# Altium PCB IMUCubePIN_Pcb.PcbDoc
Units mil, origin at the board's own origin, x right, y up, seen from the top; angles counter-clockwise.
Board outline 400 x 400 mil, 2 copper layers (Top Layer, Bottom Layer), stack 38.583 mil thick; 2 components, 6 nets, 20 pads, 1 vias.
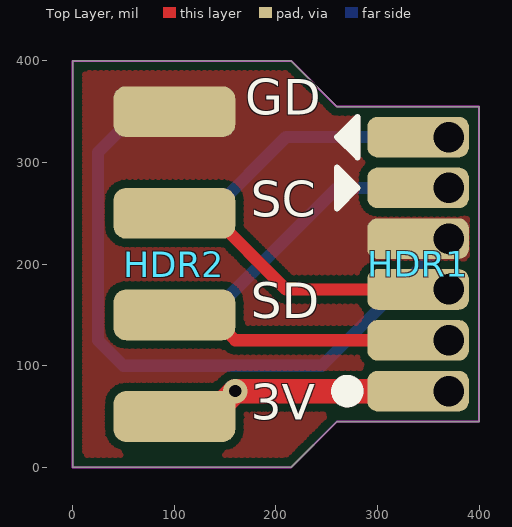
[diagram p0: Top Layer view]
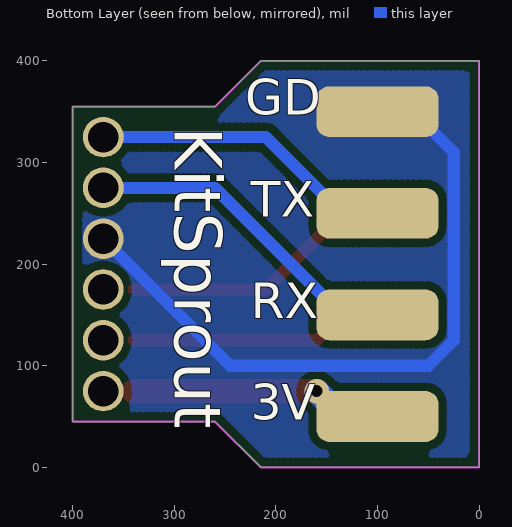
[diagram p1: Bottom Layer view, seen from below]

## Layer stack, top to bottom
Top Solder: solder mask 0.3937, Solder Resist, Dk 3.5
Top Layer: signal copper 1.5748
Dielectric 1: dielectric 35.4331, FR-4, Dk 4.8
Bottom Layer: signal copper 1.5748
Bottom Solder: solder mask 0.3937, Solder Resist, Dk 3.5

## Board outline
0,0 0,400 215,400 260,355 400,355 400,45 260,45 215,0

## Design rules (kind name [scope] priority, off if disabled: settings)
Clearance ClearancePolygon [InPolygon] p1: gap=8
Clearance [All] p2: gap=6
ComponentClearance [All] p1: gap=0 collisioncheckmode=3 verticalgap=0 showdistances=FALSE
Height [All] p1: minheight=0 maxheight=5000 prefheight=500
HoleSize [All] p1: absolutevalues=TRUE maxlimit=200 minlimit=1 maxpercent=80.000 minpercent=20.000
HoleToHoleClearance [All] p1: gap=6 allowstackedmicrovias=TRUE
MinimumSolderMaskSliver [All] p1: minsoldermaskwidth=0
PolygonConnect [All] p1: connectstyle=Direct reliefconductorwidth=10 reliefentries=4 polygonreliefangle="90 Angle" airgapwidth=10
RoutingVias [All] p1: holewidth=12 width=24 viastyle="Through Hole" minholewidth=12 minwidth=20 maxholewidth=28 maxwidth=50
SilkToSilkClearance [All] p1: silktosilkclearance=0
SilkToSolderMaskClearance [IsPad] p1: minsilkscreentomaskgap=0 clearancetoexposedcopper=TRUE
SolderMaskExpansion [All] p1: expansion=2
Width [All] p1: maxlimit=50 minlimit=6 preferedwidth=10
23 further rules are at their usual default settings.

## Components (designator, comment, footprint, x,y, rotation, side; value= is the part's Value field where it differs from the comment)
HDR1 "HDR1x6_1.27" HDR1X6_1.27_180H 340,325 r0 top
HDR2 "HDR2x4_2.54" HDR2X4_2.54_180H 100,50 r180 top

## Footprints (in the part's own frame and the unit in brackets; to place one, negate y for a bottom-side part, rotate by r counter-clockwise, add the part's x,y. Pads: shape width x height; smd on the part's side, far side on the other; paste and mask are expansions set on the pad)
HDR1X6_1.27_180H [mil]
  rrect50% 100x40 smd: 1(0,0) 2(0,-50) 3(0,-100) 4(0,-150) 5(0,-200) 6(0,-250)
  body extent -47,-275 265,25, height 49
HDR2X4_2.54_180H [mil]
  rrect50% 120x50 smd: 1(0,0) 3(0,-100) 5(0,-200) 7(0,-300)
  rrect50% 120x50 smd far side: 2(0,0) 4(0,-100) 6(0,-200) 8(0,-300)
  body extent -38,-350 415,50, height 100

## Part data
HDR1 HDR2: "Header"

## Free pads (board coordinates)
  round 40 hole 30: 1(370,75) 1(370,125) 1(370,175) 1(370,225) 1(370,275) 1(370,325)

## Via types
v1: diameter 24, hole 12, Top Layer to Bottom Layer, 1 vias

## Nets (pads, with @x,y where several pads share a name; then routed paths per layer and width w, separated by ;. In a path a pad name is that pad's centre, name@x,y a point inside that pad or via, vN(x,y) a via of type N, cw(c..) or ccw(c..) an arc to the next point about the centre after c; other vN are vias at no path point)
3V3: HDR1.6 HDR2.1 HDR2.2 pad.1@370,75 | length 320.7
  Top Layer w24: HDR2.1 135,50 v1(160,75) HDR1.6
  Bottom Layer w24: HDR2.2 135,50 v1(160,75)
GND: HDR1.3 HDR2.7 HDR2.8 pad.1@370,225 | length 683.7
  Bottom Layer w12: HDR2.8 65,350 25,310 25,125 50,100 245,100 pad.1@370,225
RX: HDR1.2 HDR2.4 pad.1@370,275 | length 321.8
  Bottom Layer w12: HDR2.4 135,150 260,275 pad.1@370,275
SWCLK: HDR1.4 HDR2.5 pad.1@370,175 | length 271.1
  Top Layer w12: HDR2.5 135,250 210,175 HDR1.4
SWDIO: HDR1.5 HDR2.3 pad.1@370,125 | length 250.4
  Top Layer w12: HDR2.3 135,150 160,125 HDR1.5
TX: HDR1.1 HDR2.6 pad.1@370,325 | length 301.1
  Bottom Layer w12: HDR2.6 135,250 210,325 pad.1@370,325

## Polygon pours and split planes (outlines as drawn)
no net on Keep-Out Layer "Keep-Out" (none, remove dead copper): 0,0 0,400 215,400 260,355 400,355 400,45 260,45 215,0
GND on Top Layer "Top Layer" (hatched 45Degree grid 4 track 6, remove dead copper, pour order 1): 0,0 0,400 215,400 260,355 400,355 400,45 260,45 215,0
GND on Bottom Layer "Bottom Layer" (hatched 45Degree grid 4 track 6, remove dead copper, pour order 0): 0,0 0,400 215,400 260,355 400,355 400,45 260,45 215,0

## Silkscreen, mask and mechanical layers (free items; w line width, h text height)
Top Overlay:
  circle w16: c270.28,74.96 r8
  region: 280.28,274.96 260.28,254.96 260.28,294.96
  region: 260.28,324.96 280.28,344.96 280.28,304.96
  lines w6: 260.28,254.96 260.28,294.96 280.28,274.96 260.28,254.96 ; 260.28,324.96 280.28,304.96 280.28,344.96 260.28,324.96
  text "GD" at 170,335 h60
  text "SC" at 175,235 h60
  text "SD" at 175,135 h60
  text "3V" at 175,35 h60
Bottom Overlay:
  text "GD" at 230,335 h60
  text "KitSprout" at 315,335 h80 r90
  text "TX" at 225,235 h60
  text "RX" at 225,135 h60
  text "3V" at 225,35 h60
Mechanical 1:
  the board outline again, w2